# Altium PCB PCB3.PcbDoc
Units mm, origin at the board's own origin, x right, y up, seen from the top; angles counter-clockwise.
Board outline 226 x 100 mm, 2 copper layers (Top Layer, Top, Bottom Layer, Bottom); 1 components, 38 nets, 21 pads, 0 vias.
Unrouted connection lines stored in the file: 5.
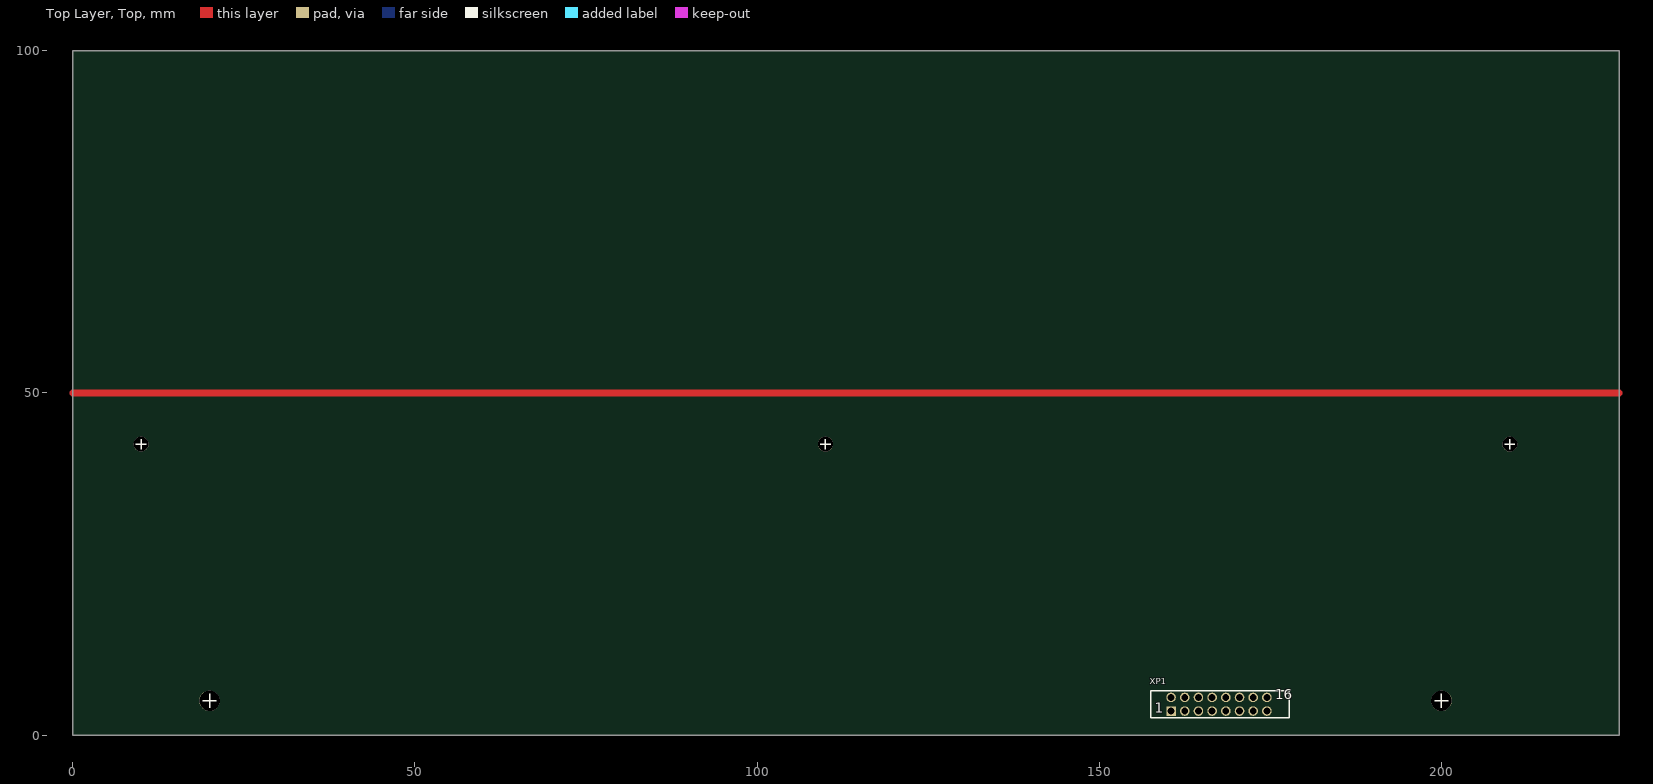
[diagram p0: Top Layer, Top view]
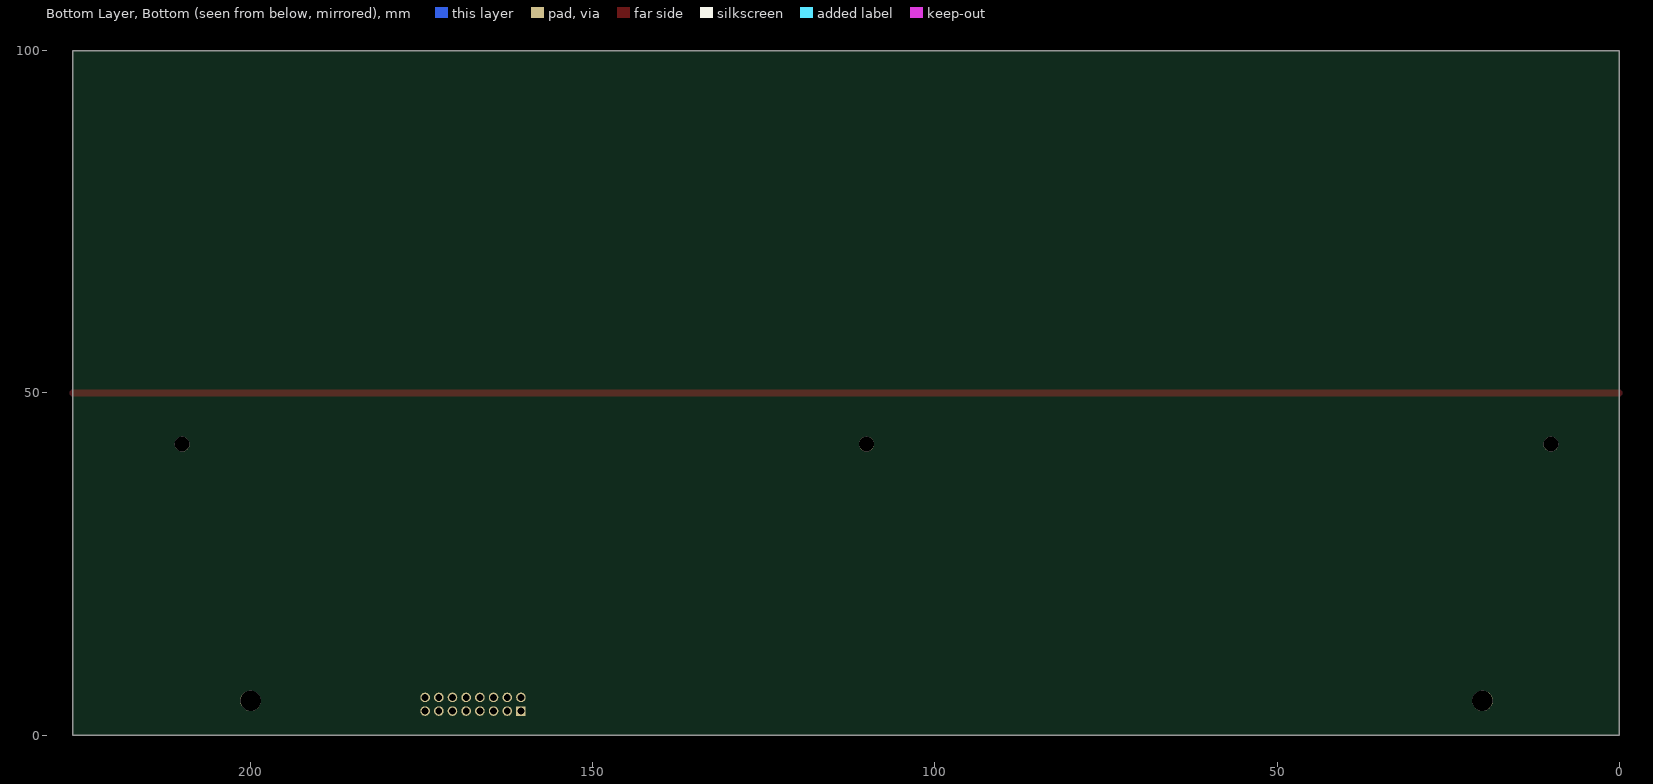
[diagram p1: Bottom Layer, Bottom view, seen from below]

## Layer stack, top to bottom
Top Solder, Top Mask: solder mask 0.0102, Solder Resist, Dk 3.5
Top Layer, Top: signal copper 0.0356
Dielectric 1: dielectric 0.32, FR-4, Dk 4.8
Bottom Layer, Bottom: signal copper 0.0356
Bottom Solder, Bot Mask: solder mask 0.0102, Solder Resist, Dk 3.5

## Board outline
0,0 0,100 226,100 226,0

## Design rules (kind name [scope] priority, off if disabled: settings)
Clearance [All] p1: gap=0.254 ignorepadtopadclearanceinfootprint=FALSE except(0.3: Arc-Arc Arc-Track Arc-THPad Arc-Via Track-Track Track-THPad Track-Via THPad-THPad THPad-Via Via-Via)
PlaneClearance [All] p1: clearance=0.254
PolygonConnect [All] p1: connectstyle=Relief reliefconductorwidth=0.254 reliefentries=4 polygonreliefangle="90 Angle" airgapwidth=0.254
RoutingVias [All] p1: holewidth=0.711 width=1.27 viastyle="Through Hole" minholewidth=0.711 minwidth=1.27 maxholewidth=0.711 maxwidth=1.27
SolderMaskExpansion [All] p1: expansion=0.102 istentingtop=FALSE
SupplyNets "Schematic Supply Nets_3" [InNet('+5V')] p1: voltage=0.000
SupplyNets "Schematic Supply Nets_2" [InNet('GND')] p2: voltage=0.000
SupplyNets "Schematic Supply Nets_1" [InNet('-5V')] p3: voltage=0.000
SupplyNets "Schematic Supply Nets" [InNet('+5Vn')] p4: voltage=0.000
Width [All] p1: maxlimit=0.254 minlimit=0.254 preferedwidth=0.254
29 further rules are at their usual default settings.

## Components (designator, comment, footprint, x,y, rotation, side; value= is the part's Value field where it differs from the comment)
XP1 "DS1018-02-16B2" DS1018-02-16B2 160.5,5.5 r0 top

## Footprints (in the part's own frame and the unit in brackets; to place one, negate y for a bottom-side part, rotate by r counter-clockwise, add the part's x,y. Pads: shape width x height; smd on the part's side, far side on the other; paste and mask are expansions set on the pad)
DS1018-02-16B2 [mm]
  rect 1.4x1.4 hole 1: 1(0,-2)
  round 1.4 hole 1: 2(0,0) 3(2,-2) 4(2,0) 5(4,-2) 6(4,0) 7(6,-2) 8(6,0) 9(8,-2) 10(8,0) 11(10,-2) 12(10,0) 13(12,-2) 14(12,0) 15(14,-2) 16(14,0)
  silkscreen extent -3,-3 17.3,1, body extent -3,-3 17.2,1, height 5

## Part data
XP1: "pitch 2mm, 20 pin 2x10"

## Free pads (board coordinates)
  round 2.2 hole 2.2 unplated: 0(10,42.5) 0(110,42.5) 0(210,42.5)
  round 3 hole 3 unplated: 0(20,5) 0(200,5)

## Nets (pads, with @x,y where several pads share a name; then routed paths per layer and width w, separated by ;. In a path a pad name is that pad's centre, name@x,y a point inside that pad or via, vN(x,y) a via of type N, cw(c..) or ccw(c..) an arc to the next point about the centre after c; other vN are vias at no path point)
+5.2V: XP1.1 XP1.7
+5V: 
+5Vn: 
-5V: 
-8V: XP1.9 XP1.15
CLK_ADI: XP1.12
CLK_RgI: XP1.4
DAT_ADI: XP1.10
DAT_RgI: XP1.2
ENb_RgI: XP1.6
GND: XP1.3 XP1.5 XP1.11 XP1.13
NetC1_1: 
NetC1_2: 
NetC2_1: 
NetC2_2: 
NetC3_1: 
NetC3_2: 
NetC4_2: 
NetC5_2: 
NetC6_2: 
NetC7_1: 
NetC7_2: 
NetC8_1: 
NetC8_2: 
NetC9_2: 
NetC10_2: 
NetDA1_6: 
NetDA2_6: 
NetDA3_6: 
NetDA4_6: 
NetDA5_6: 
NetR15_1: 
NetR22_1: 
NetVD6_2: 
NetVD7_2: 
NetXP1_16: XP1.16
OVLI,1: XP1.8
RUN_ADI: XP1.14
copper on no net: | length 226
  Top Layer, Top w1: 0,50 226,50

## Silkscreen, mask and mechanical layers (free items; w line width, h text height)
Top Overlay, Top Silk:
  lines w0.2: 9.25,42.5 10.75,42.5 ; 10,41.75 10,43.25 ; 19,5 21,5 ; 20,4 20,6 ; 109.25,42.5 110.75,42.5 ; 110,41.75 110,43.25 ; 199,5 201,5 ; 200,4 200,6 ; 209.25,42.5 210.75,42.5 ; 210,41.75 210,43.25
Mechanical 1, Top Assy:
  the board outline again, w0.2
Mechanical 4, Help:
  lines w0.1: 10,41 10,44 ; 15,0 15,10 25,10 25,0 ; 18,5 22,5 ; 20,3 20,7 ; 110,41 110,44 ; 195,0 195,10 205,10 205,0 ; 198,5 202,5 ; 200,3 200,7 ; 210,41 210,44

## Text inside footprints (layer, text, board x,y; h text height)
XP1: Top Overlay, Top Silk "16" at 175.698,4.727 h2.5; Top Overlay, Top Silk "1" at 158.088,2.744 h2.5